# Altium PCB 数粒机接收板2通道.PcbDoc (part 1 of 2)
Units mm, origin at the board's own origin, x right, y up, seen from the top; angles counter-clockwise.
Board outline 152 x 52 mm, 2 copper layers (Top Layer, Bottom Layer); 73 components, 51 nets, 228 pads, 94 vias.
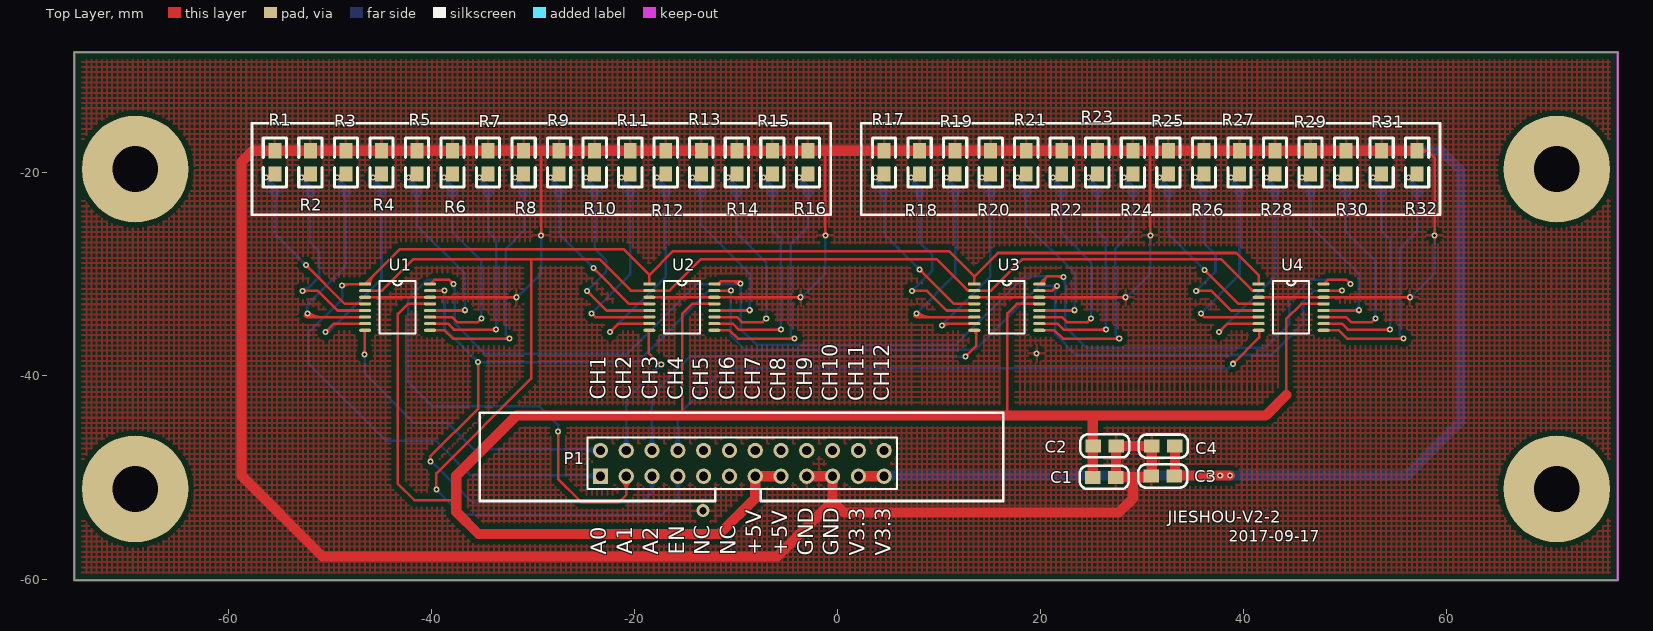
[diagram p0: Top Layer view]
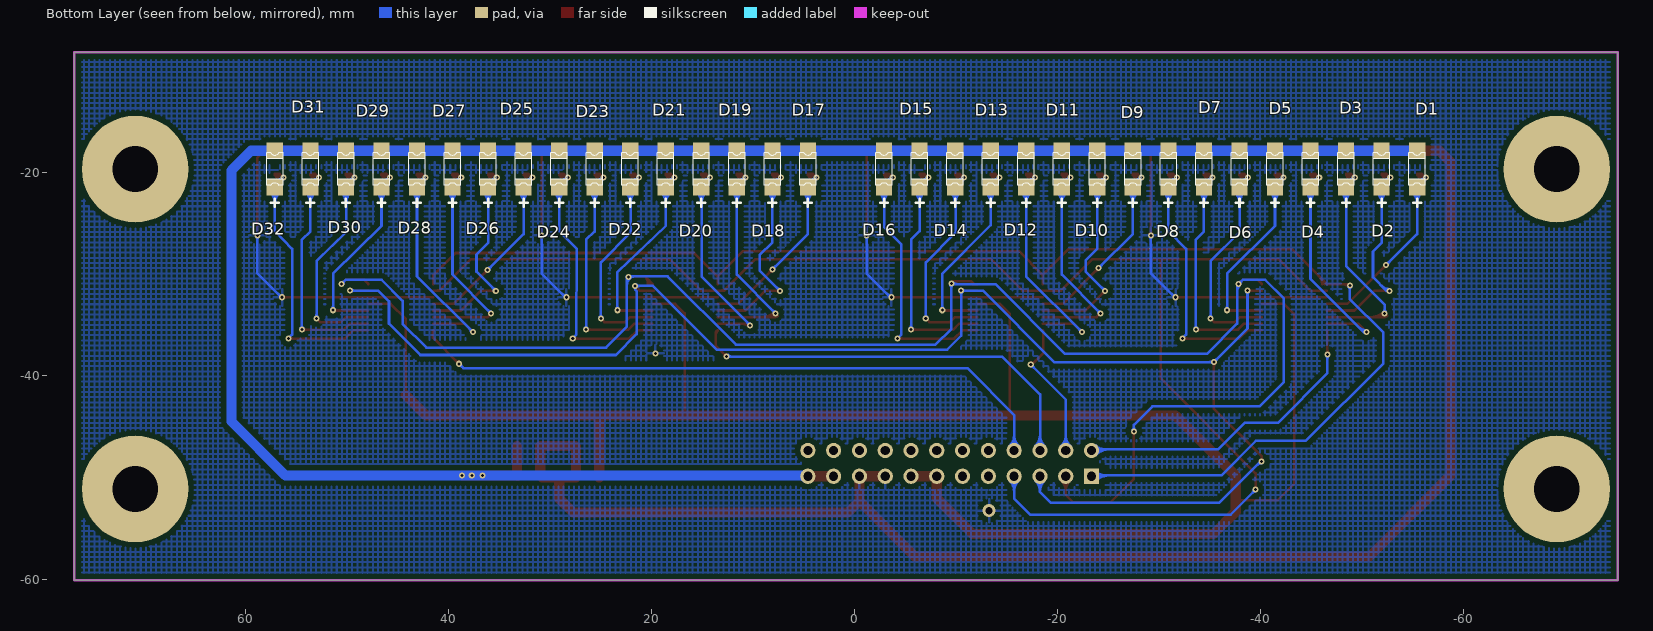
[diagram p1: Bottom Layer view, seen from below]

## Layer stack, top to bottom
Top Layer: signal copper 0.0356
Dielectric: dielectric 0.32, FR-4, Dk 4.8
Bottom Layer: signal copper 0.0356

## Board outline
-75.169,-60.122 76.831,-60.122 76.831,-8.122 -75.169,-8.122

## Design rules (kind name [scope] priority, off if disabled: settings)
Clearance Clearance_1 [InPolygon] p1: gap=0.508
Clearance [All] p2: gap=0.2
HoleSize [All] p1 off: absolutevalues=TRUE maxlimit=2.54 minlimit=0.025 maxpercent=80.000 minpercent=20.000
MinimumSolderMaskSliver [All] p1 off: minsoldermaskwidth=0.2
PolygonConnect [All] p1: connectstyle=Relief reliefconductorwidth=0.254 reliefentries=4 polygonreliefangle="90 Angle"
RoutingVias [All] p1: holewidth=0.254 width=0.6 viastyle="Through Hole" minholewidth=0.254 minwidth=0.6 maxholewidth=0.254 maxwidth=0.6
SilkToSilkClearance [All] p1: silktosilkclearance=-10
SilkscreenOverComponentPads [All] p1: minsilkscreentomaskgap=0
SolderMaskExpansion [All] p1: expansion=0.102
TestPointUsage [All] p1: valid=0 allowmultiple=FALSE
Testpoint [(IsPad And (OnTopLayer Or OnBottomLayer))] p1: side=3 testpointundercomponent=TRUE minsize=1.016 maxsize=2.54 preferedsize=1.524 minholesize=0 maxholesize=1.016 preferedholesize=0.813 testpointgrid=0.025 style=297 order=0-112345678
Width [All] p1: maxlimit=2 minlimit=0.2 preferedwidth=0.254
20 further rules are at their usual default settings.

## Components (designator, comment, footprint, x,y, rotation, side; value= is the part's Value field where it differs from the comment)
C1 "贴片电容 10uf" 0805c 27.412,-49.979 r180 top
C2 "贴片电容 0.1uf" 0805c 27.463,-46.88 r180 top
C3 "贴片电容 10uf" 0805c 30.892,-49.852 r0 top
C4 "贴片电容 0.1uf" 0805c 30.943,-46.905 r0 top
D1 "红外接收珠子" jieshou1206 -55.419,-21.422 r0 bottom
D2 "红外接收珠子" jieshou1206 -51.919,-21.422 r0 bottom
D3 "红外接收珠子" jieshou1206 -48.419,-21.422 r0 bottom
D4 "红外接收珠子" jieshou1206 -44.919,-21.422 r0 bottom
D5 "红外接收珠子" jieshou1206 -41.419,-21.422 r0 bottom
D6 "红外接收珠子" jieshou1206 -37.919,-21.422 r0 bottom
D7 "红外接收珠子" jieshou1206 -34.419,-21.422 r0 bottom
D8 "红外接收珠子" jieshou1206 -30.919,-21.422 r0 bottom
D9 "红外接收珠子" jieshou1206 -27.419,-21.422 r0 bottom
D10 "红外接收珠子" jieshou1206 -23.919,-21.422 r0 bottom
D11 "红外接收珠子" jieshou1206 -20.419,-21.422 r0 bottom
D12 "红外接收珠子" jieshou1206 -16.919,-21.422 r0 bottom
D13 "红外接收珠子" jieshou1206 -13.419,-21.422 r0 bottom
D14 "红外接收珠子" jieshou1206 -9.919,-21.422 r0 bottom
D15 "红外接收珠子" jieshou1206 -6.419,-21.422 r0 bottom
D16 "红外接收珠子" jieshou1206 -2.919,-21.422 r0 bottom
D17 "红外接收珠子" jieshou1206 4.581,-21.422 r0 bottom
D18 "红外接收珠子" jieshou1206 8.081,-21.422 r0 bottom
D19 "红外接收珠子" jieshou1206 11.581,-21.422 r0 bottom
D20 "红外接收珠子" jieshou1206 15.081,-21.422 r0 bottom
D21 "红外接收珠子" jieshou1206 18.581,-21.422 r0 bottom
D22 "红外接收珠子" jieshou1206 22.081,-21.422 r0 bottom
D23 "红外接收珠子" jieshou1206 25.581,-21.422 r0 bottom
D24 "红外接收珠子" jieshou1206 29.081,-21.422 r0 bottom
D25 "红外接收珠子" jieshou1206 32.581,-21.422 r0 bottom
D26 "红外接收珠子" jieshou1206 36.081,-21.422 r0 bottom
D27 "红外接收珠子" jieshou1206 39.581,-21.422 r0 bottom
D28 "红外接收珠子" jieshou1206 43.081,-21.422 r0 bottom
D29 "红外接收珠子" jieshou1206 46.581,-21.422 r0 bottom
D30 "红外接收珠子" jieshou1206 50.081,-21.422 r0 bottom
D31 "红外接收珠子" jieshou1206 53.581,-21.422 r0 bottom
D32 "红外接收珠子" jieshou1206 57.081,-21.422 r0 bottom
P1 "牛角插座" HDR2X12 -23.351,-49.87 r0 top
R1 "贴片电阻" 0805r -55.419,-17.822 r270 top
R2 "贴片电阻" 0805r -51.919,-17.822 r270 top
R3 "贴片电阻" 0805r -48.419,-17.822 r270 top
R4 "贴片电阻" 0805r -44.919,-17.822 r270 top
R5 "贴片电阻" 0805r -41.419,-17.822 r270 top
R6 "贴片电阻" 0805r -37.919,-17.822 r270 top
R7 "贴片电阻" 0805r -34.419,-17.822 r270 top
R8 "贴片电阻" 0805r -30.919,-17.822 r270 top
R9 "贴片电阻" 0805r -27.419,-17.822 r270 top
R10 "贴片电阻" 0805r -23.919,-17.822 r270 top
R11 "贴片电阻" 0805r -20.419,-17.822 r270 top
R12 "贴片电阻" 0805r -16.919,-17.822 r270 top
R13 "贴片电阻" 0805r -13.419,-17.822 r270 top
R14 "贴片电阻" 0805r -9.919,-17.822 r270 top
R15 "贴片电阻" 0805r -6.419,-17.822 r270 top
R16 "贴片电阻" 0805r -2.919,-17.822 r270 top
R17 "贴片电阻" 0805r 4.581,-17.822 r270 top
R18 "贴片电阻" 0805r 8.081,-17.822 r270 top
R19 "贴片电阻" 0805r 11.581,-17.822 r270 top
R20 "贴片电阻" 0805r 15.081,-17.822 r270 top
R21 "贴片电阻" 0805r 18.581,-17.822 r270 top
R22 "贴片电阻" 0805r 22.081,-17.822 r270 top
R23 "贴片电阻" 0805r 25.581,-17.822 r270 top
R24 "贴片电阻" 0805r 29.081,-17.822 r270 top
R25 "贴片电阻" 0805r 32.581,-17.822 r270 top
R26 "贴片电阻" 0805r 36.081,-17.822 r270 top
R27 "贴片电阻" 0805r 39.581,-17.822 r270 top
R28 "贴片电阻" 0805r 43.081,-17.822 r270 top
R29 "贴片电阻" 0805r 46.581,-17.822 r270 top
R30 "贴片电阻" 0805r 50.081,-17.822 r270 top
R31 "贴片电阻" 0805r 53.581,-17.822 r270 top
R32 "贴片电阻" 0805r 57.081,-17.822 r270 top
U1 "集成电路" TSSOP16 -46.532,-30.947 r0 top
U2 "集成电路" TSSOP16 -18.532,-30.947 r0 top
U3 "集成电路" TSSOP16 13.468,-30.947 r0 top
U4 "集成电路" TSSOP16 41.468,-30.947 r0 top

## Footprints (in the part's own frame and the unit in brackets; to place one, negate y for a bottom-side part, rotate by r counter-clockwise, add the part's x,y. Pads: shape width x height; smd on the part's side, far side on the other; paste and mask are expansions set on the pad)
0805c [mil]
  rect 60x50 smd: 1(0,0) 2(90,0)
  silkscreen extent -50,-45 140,45
0805r [mil]
  rect 60x50 smd: 1(0,0) 2(90,0)
  silkscreen extent -50,-45 140,45
HDR2X12 [mm] "Connector; Header; 12x2 P"
  rect 1.5x1.5 hole 0.9: 1(0,0)
  round 1.5 hole 0.9: 2(0,2.54) 3(2.54,0) 4(2.54,2.54) 5(5.08,0) 6(5.08,2.54) 7(7.62,0) 8(7.62,2.54) 9(10.16,0) 10(10.16,2.54) 11(12.7,0) 12(12.7,2.54) 13(15.24,0) 14(15.24,2.54) 15(17.78,0) 16(17.78,2.54) 17(20.32,0) 18(20.32,2.54) 19(22.86,0) 20(22.86,2.54) 21(25.4,0) 22(25.4,2.54) 23(27.94,0) 24(27.94,2.54)
  silkscreen extent -1.27,-1.27 29.21,3.81
jieshou1206 [mm]
  rect 1.6x1.6 smd: 1(0,0) 2(0,-3.6)
  silkscreen extent -0.8,-3.41 0.82,1.9
TSSOP16 [mm]
  rect 1.2x0.3 smd: 1(0,0)
  oval 1.2x0.3 smd: 2(0,-0.65) 3(0,-1.3) 4(0,-1.95) 5(0,-2.6) 6(0,-3.25) 7(0,-3.9) 8(0,-4.55) 9(6.4,-4.55) 10(6.4,-3.9) 11(6.4,-3.25) 12(6.4,-2.6) 13(6.4,-1.95) 14(6.4,-1.3) 15(6.4,-0.65) 16(6.4,0)
  silkscreen extent 1.43,-4.88 4.96,0.33

## Part data
C1 C2 C3 C4: library part Cap, "Ca"
D1 D2 D3 D4 D5 D6 D7 D8 D9 D10 D11 D12 D13 D14 D15 D16 D17 D18 D19 D20 D21 D22 D23 D24 D25 D26 D27 D28 D29 D30 D31 D32: library part LED0, "PD15-"
P1: library part "Header 12X2", "Header, 12-Pin, Dual row"
R1 R2 R3 R4 R5 R6 R7 R8 R9 R10 R11 R12 R13 R14 R15 R16 R17 R18 R19 R20 R21 R22 R23 R24 R25 R26 R27 R28 R29 R30 R31 R32: library part Res3
U1 U2 U3 U4: library part ADG708

## Free pads (board coordinates)
  round 10.5 hole 4.5 unplated: 1(-69.169,-19.622) 2(-69.169,-51.122) 3(70.831,-51.122) 4(70.831,-19.622)

## Via types
v1: diameter 0.6, hole 0.3, Top Layer to Bottom Layer, 93 vias
v2: diameter 1.27, hole 0.711, Top Layer to Bottom Layer, 1 vias

## Nets (pads, with @x,y where several pads share a name; then routed paths per layer and width w, separated by ;. In a path a pad name is that pad's centre, name@x,y a point inside that pad or via, vN(x,y) a via of type N, cw(c..) or ccw(c..) an arc to the next point about the centre after c; other vN are vias at no path point)
A0: P1.1 U1.1 U2.1 U3.1 U4.1 | length 147.5
  Top Layer w0.254: v1(-48.792,-31.084) -48.655,-30.947 U1.1@-46.532,-30.947 -43.088,-27.503 -21.063,-27.503 -18.532,-30.034 U2.1@-18.532,-30.947 ; v1@-48.67,-31.206 cw(c-48.044,-31.833) -48.044,-30.947 ; U1.1@-46.313,-30.947 cw(c-45.784,-30.947) -46.158,-30.573 ; U1.1@-46.059,-30.947 cw(c-44.917,-30.947) -45.724,-30.139 ; -18.532,-30.043 -16.195,-27.706 10.979,-27.706 13.468,-30.195 ; U3.1@13.468,-30.947 13.468,-30.195 ; U4.1@41.468,-30.947 41.468,-30.075 39.277,-27.884 15.779,-27.884 13.468,-30.195
  Bottom Layer w0.254: v1@-48.915,-31.206 cw(c-49.271,-31.563) -48.767,-31.563 ; v1(-48.792,-31.084) -48.767,-31.109 -48.767,-32.405 -52.083,-35.721 -52.083,-38.748 -44.434,-46.397 -39.524,-46.397 -36.127,-49.794 P1.1@-23.351,-49.794 ; -48.767,-31.44 cw(c-48.436,-31.44) v1@-48.67,-31.206 ; -25.039,-49.794 cw(c-25.039,-51.558) P1.1@-23.792,-50.31 ; -24.671,-49.794 ccw(c-24.671,-48.55) P1.1@-23.792,-49.429 ; -24.426,-49.794 cw(c-24.426,-50.945) P1.1@-23.612,-50.131
A1: P1.3 U1.16 U2.16 U3.16 U4.16 | length 185
  Top Layer w0.254: U1.16@-40.132,-30.947 -39.706,-30.521 -38.256,-30.521 v1(-37.82,-30.957) ; v1@-37.993,-30.957 ccw(c-38.41,-30.957) -38.115,-30.662 ccw(c-37.82,-30.366) v1@-37.82,-30.784 ; v1@-27.639,-45.573 cw(c-27.934,-45.868) -27.517,-45.868 cw(c-27.099,-45.868) v1@-27.394,-45.573 ; v1(-27.517,-45.45) -27.517,-50.124 -25.205,-52.435 -21.548,-52.435 -20.811,-51.699 P1.3@-20.811,-49.87 ; P1.3@-21.252,-50.31 cw(c-22.315,-51.374) -20.811,-51.374 cw(c-19.307,-51.374) P1.3@-20.371,-50.31 ; P1.3@-21.072,-50.131 cw(c-21.702,-50.761) -20.811,-50.761 cw(c-19.92,-50.761) P1.3@-20.55,-50.131 ; U2.16@-12.132,-30.947 -11.763,-30.947 -11.49,-30.674 -9.788,-30.674 -9.601,-30.86 v1@-9.601,-30.947 ; U2.16@-11.659,-30.947 cw(c-11.408,-30.947) -11.585,-30.769 ; -10.52,-30.674 cw(c-10.52,-31.885) v1@-9.663,-31.029 ; -9.906,-30.674 cw(c-9.906,-31.272) v1@-9.483,-30.849 ; U3.16@19.868,-30.947 20.624,-30.191 ; U3.16@20.088,-30.962 cw(c20.572,-30.929) 20.229,-30.586 ; U3.16@20.341,-30.945 cw(c21.312,-30.879) 20.624,-30.191 ; 21.697,-30.191 cw(c21.697,-30.782) v1@22.115,-30.364 ; v1(22.238,-30.242) 22.187,-30.191 20.624,-30.191 ; U4.16@47.868,-30.947 48.294,-30.521 50.1,-30.521 v1(50.536,-30.957) ; v1@50.363,-30.957 ccw(c49.945,-30.957) 50.241,-30.662 ccw(c50.536,-30.366) v1@50.536,-30.784
  Bottom Layer w0.254: v1@-37.993,-30.957 ccw(c-38.41,-30.957) -38.115,-30.662 ccw(c-37.82,-30.366) v1@-37.82,-30.784 ; v1@-37.942,-31.079 cw(c-38.544,-31.681) -37.693,-31.681 ; v1@-27.639,-45.328 ccw(c-27.934,-45.033) -27.517,-45.033 ccw(c-27.099,-45.033) v1@-27.394,-45.328 ; v1(-27.517,-45.45) -27.517,-44.826 -29.349,-42.994 -39.872,-42.994 -42.29,-40.576 -42.29,-37.332 -42.29,-32.354 -40.457,-30.521 -38.256,-30.521 -37.693,-31.084 -37.693,-34.843 -34.721,-37.815 -20.742,-37.815 -13.873,-30.947 -9.581,-30.947 v1(-9.54,-30.906) -9.54,-35.351 -7.973,-36.918 11.673,-36.918 18.4,-30.191 22.409,-30.191 22.409,-35.148 24.459,-37.198 42.161,-37.198 44.491,-34.869 44.491,-32.608 46.578,-30.521 50.1,-30.521 v1@50.526,-30.947 ; -10.056,-30.947 ccw(c-10.056,-30.391) v1@-9.663,-30.784 ; -9.86,-30.947 cw(c-9.86,-31.226) -9.663,-31.029 cw(c-9.958,-31.324) -9.54,-31.324 cw(c-9.123,-31.324) v1@-9.418,-31.029 ; 21.697,-30.191 cw(c21.697,-30.782) 22.115,-30.364 cw(c21.406,-31.073) 22.409,-31.073 ; v1@50.363,-30.957 ccw(c49.945,-30.957) 50.241,-30.662 ccw(c50.536,-30.366) v1@50.536,-30.784 ; v1@50.526,-30.957 v1@50.526,-30.947 ; v1(50.536,-30.957) v1@50.526,-30.947
A2: P1.5 U1.15 U2.15 U3.15 U4.15 | length 170.9
  Top Layer w0.254: v1@-40.217,-48.303 ccw(c-40.451,-48.069) -40.12,-48.069 ; U1.15@-40.132,-31.597 v1(-38.714,-31.597) ; -40.12,-47.946 ccw(c-39.616,-47.946) v1@-39.972,-48.303 ; v1(-40.095,-48.425) -40.12,-48.4 -40.12,-47.943 -35.407,-43.23 v1(-35.407,-38.628) ; v1@-38.836,-31.719 ccw(c-39.131,-32.014) -39.131,-31.597 ccw(c-39.131,-31.179) v1@-38.836,-31.474 ; v1@-35.529,-38.75 cw(c-35.824,-39.045) -35.407,-39.045 cw(c-34.989,-39.045) v1@-35.284,-38.75 ; U2.15@-12.132,-31.597 v1(-10.505,-31.597) ; v1@-10.628,-31.719 ccw(c-10.923,-32.014) -10.923,-31.597 ccw(c-10.923,-31.179) v1@-10.628,-31.474 ; U3.15@19.774,-31.613 21.12,-31.613 v1(21.603,-31.131) ; v1@21.43,-31.131 cw(c21.012,-31.131) 21.307,-31.426 cw(c21.603,-31.721) v1@21.603,-31.304 ; U4.15@47.868,-31.597 49.667,-31.597 v1(49.698,-31.567) ; 49.207,-31.597 ccw(c49.207,-31.076) v1@49.575,-31.444 ; 49.353,-31.597 cw(c49.353,-31.911) v1@49.575,-31.689
  Bottom Layer w0.254: v1@-40.095,-48.598 cw(c-40.095,-49.281) -39.612,-48.798 ; v1(-40.095,-48.425) -40.095,-48.361 -40.089,-48.355 -40.056,-48.355 -35.924,-52.486 -19.338,-52.486 -18.271,-51.419 P1.5@-18.271,-49.87 ; v1@-38.836,-31.719 cw(c-39.131,-32.014) -38.714,-32.014 cw(c-38.296,-32.014) v1@-38.591,-31.719 ; v1(-38.714,-31.597) -38.714,-35.321 v1(-35.407,-38.628) -19.675,-38.628 -12.644,-31.597 v1(-10.505,-31.597) -10.505,-36.037 -9.141,-37.401 13.577,-37.401 19.847,-31.131 v1(21.603,-31.131) 21.603,-31.484 21.444,-31.643 21.444,-35.885 23.494,-37.935 42.746,-37.935 45.837,-34.843 45.837,-32.659 46.899,-31.597 49.667,-31.597 v1(49.698,-31.567) ; v1@-35.58,-38.628 ccw(c-35.997,-38.628) -35.702,-38.332 ccw(c-35.407,-38.037) v1@-35.407,-38.455 ; v1@-35.284,-38.75 cw(c-34.989,-39.045) -34.989,-38.628 cw(c-34.989,-38.21) v1@-35.284,-38.505 ; P1.5@-18.712,-50.31 cw(c-19.775,-51.374) -18.271,-51.374 cw(c-16.767,-51.374) P1.5@-17.831,-50.31 ; P1.5@-18.532,-50.131 cw(c-19.162,-50.761) -18.271,-50.761 cw(c-17.38,-50.761) P1.5@-18.01,-50.131 ; v1@-10.628,-31.474 cw(c-10.923,-31.179) -10.923,-31.597 cw(c-10.923,-32.014) -10.628,-31.719 cw(c-10.923,-32.014) -10.505,-32.014 cw(c-10.088,-32.014) v1@-10.383,-31.719 ; v1@21.48,-31.253 ccw(c21.185,-31.548) 21.185,-31.131 ccw(c21.185,-30.713) v1@21.48,-31.008 ; 49.207,-31.597 ccw(c49.207,-31.076) v1@49.575,-31.444 ; 49.353,-31.597 cw(c49.353,-31.911) v1@49.575,-31.689
CH1: P1.2 U1.8 | length 35.5
  Top Layer w0.254: v1@-46.705,-37.743 ccw(c-47,-37.448) -46.583,-37.448 ccw(c-46.165,-37.448) v1@-46.46,-37.743 ; v1(-46.583,-37.866) -46.583,-35.548 U1.8@-46.532,-35.497 ; -46.583,-35.675 cw(c-46.354,-35.675) U1.8@-46.516,-35.513
  Bottom Layer w0.254: v1@-46.705,-37.988 cw(c-47,-38.283) -46.583,-38.283 cw(c-46.165,-38.283) v1@-46.46,-37.988 ; v1(-46.583,-37.866) -46.583,-39.727 -41.695,-44.615 -38.435,-44.615 -35.848,-47.203 P1.2@-23.351,-47.203 ; -25.162,-47.203 cw(c-25.162,-49.14) P1.2@-23.792,-47.77 ; P1.2@-23.792,-46.889 cw(c-24.549,-46.132) -24.549,-47.203 cw(c-24.549,-48.527) P1.2@-23.612,-47.591
CH1-1: D1.1 R1.2 U1.4 | length 29
  Top Layer w0.254: v1@-56.307,-20.518 cw(c-55.89,-20.936) R1.2@-55.561,-20.446 ; v1(-56.274,-20.435) -56.224,-20.435 -55.897,-20.108 R1.2@-55.419,-20.108 ; v1@-56.089,-20.3 cw(c-55.715,-20.674) R1.2@-55.419,-20.235 ; v1@-52.359,-29.247 cw(c-52.359,-29.665) -52.063,-29.37 cw(c-51.768,-29.074) v1@-52.186,-29.074 ; v1(-52.359,-29.074) -48.536,-32.897 U1.4@-46.532,-32.897
  Bottom Layer w0.254: v1@-56.274,-20.608 cw(c-56.274,-21.025) -55.979,-20.73 cw(c-55.684,-20.435) v1@-56.101,-20.435 ; v1(-56.274,-20.435) -55.419,-21.29 D1.1@-55.419,-21.422 -55.419,-26.014 v1(-52.359,-29.074) v1@-52.351,-29.066 ; D1.1@-56.076,-21.276 ccw(c-57.035,-21.063) -56.34,-20.369 ccw(c-55.422,-19.451) D1.1@-55.42,-20.749 ; D1.1@-56.013,-20.696 cw(c-56.499,-21.182) D1.1@-55.828,-21.331 ; D1.1@-55.895,-21.898 cw(c-57.044,-23.047) -55.419,-23.047 cw(c-53.795,-23.047) D1.1@-54.944,-21.898 ; D1.1@-55.716,-21.718 cw(c-56.431,-22.433) -55.419,-22.433 cw(c-54.408,-22.433) D1.1@-55.123,-21.718 ; v1@-52.532,-29.074 ccw(c-52.949,-29.074) -52.654,-28.779 ccw(c-52.359,-28.484) v1@-52.359,-28.901
CH1-2: D2.1 R2.2 U1.5 | length 31.5
  Top Layer w0.254: v1@-52.807,-20.518 cw(c-52.39,-20.936) R2.2@-52.061,-20.446 ; v1(-52.774,-20.435) -52.724,-20.435 -52.397,-20.108 R2.2@-51.919,-20.108 ; v1(-52.679,-31.617) -51.18,-31.617 -49.251,-33.547 U1.5@-46.532,-33.547 ; v1@-52.589,-20.3 cw(c-52.215,-20.674) R2.2@-51.919,-20.235 ; v1@-52.556,-31.74 cw(c-52.261,-32.035) -52.261,-31.617 cw(c-52.261,-31.2) v1@-52.556,-31.495
  Bottom Layer w0.254: v1@-52.774,-20.608 cw(c-52.774,-21.025) -52.479,-20.73 cw(c-52.184,-20.435) v1@-52.601,-20.435 ; v1(-52.774,-20.435) -51.919,-21.29 D2.1@-51.919,-21.422 -51.919,-26.898 -51.067,-27.75 -51.067,-30.264 -52.42,-31.617 v1(-52.679,-31.617) ; v1@-52.679,-31.698 ccw(c-52.679,-31.27) -52.376,-31.573 ; v1@-52.679,-31.444 ccw(c-52.679,-30.403) -51.942,-31.139 ; D2.1@-52.576,-21.276 ccw(c-53.534,-21.063) -52.84,-20.369 ccw(c-51.922,-19.451) D2.1@-51.92,-20.749 ; D2.1@-52.513,-20.696 cw(c-52.999,-21.182) D2.1@-52.328,-21.331 ; D2.1@-52.395,-21.898 cw(c-53.544,-23.047) -51.919,-23.047 cw(c-50.295,-23.047) D2.1@-51.444,-21.898 ; D2.1@-52.216,-21.718 cw(c-52.931,-22.433) -51.919,-22.433 cw(c-50.908,-22.433) D2.1@-51.623,-21.718
CH1-3: D3.1 R3.2 U1.6 | length 34.5
  Top Layer w0.254: -52.458,-34.064 ccw(c-52.138,-33.744) -52.138,-34.197 ; v1@-52.279,-33.884 ccw(c-51.525,-33.13) -51.525,-34.197 ; v1(-52.221,-33.827) -52.221,-34.056 -52.08,-34.197 U1.6@-46.532,-34.197 ; v1@-52.099,-33.705 ccw(c-50.911,-32.517) -50.911,-34.197 ; v1@-49.307,-20.518 cw(c-48.89,-20.936) R3.2@-48.561,-20.446 ; v1(-49.274,-20.435) -49.224,-20.435 -48.897,-20.108 R3.2@-48.419,-20.108 ; v1@-49.089,-20.3 cw(c-48.715,-20.674) R3.2@-48.419,-20.235
  Bottom Layer w0.254: v1@-52.344,-33.705 ccw(c-52.639,-33.41) -52.221,-33.41 ccw(c-51.804,-33.41) v1@-52.099,-33.705 ; v1(-52.221,-33.827) -52.221,-32.964 -48.419,-29.161 D3.1@-48.419,-21.422 -48.419,-21.29 v1(-49.274,-20.435) ; v1@-49.274,-20.608 cw(c-49.274,-21.025) -48.979,-20.73 cw(c-48.684,-20.435) v1@-49.101,-20.435 ; D3.1@-49.076,-21.276 ccw(c-50.034,-21.063) -49.34,-20.369 ccw(c-48.423,-19.451) D3.1@-48.42,-20.749 ; D3.1@-49.013,-20.696 cw(c-49.499,-21.182) D3.1@-48.828,-21.331 ; D3.1@-48.895,-21.898 cw(c-50.044,-23.047) -48.419,-23.047 cw(c-46.795,-23.047) D3.1@-47.944,-21.898 ; D3.1@-48.716,-21.718 cw(c-49.431,-22.433) -48.419,-22.433 cw(c-47.408,-22.433) D3.1@-48.123,-21.718
CH1-4: D4.1 R4.2 U1.7 | length 34.1
  Top Layer w0.254: v1(-50.418,-35.684) -49.581,-34.847 U1.7@-46.532,-34.847 ; v1@-50.418,-35.511 ccw(c-50.418,-35.093) -50.123,-35.388 ccw(c-49.827,-35.684) v1@-50.245,-35.684 ; v1@-45.807,-20.518 cw(c-45.39,-20.936) R4.2@-45.061,-20.446 ; v1(-45.774,-20.435) -45.724,-20.435 -45.397,-20.108 R4.2@-44.919,-20.108 ; v1@-45.589,-20.3 cw(c-45.215,-20.674) R4.2@-44.919,-20.235
  Bottom Layer w0.254: v1@-50.418,-35.765 ccw(c-50.418,-35.329) -50.11,-35.637 ; v1(-50.418,-35.684) -50.157,-35.684 -44.919,-30.446 D4.1@-44.919,-21.422 -44.919,-21.29 v1(-45.774,-20.435) ; v1@-50.418,-35.511 ccw(c-50.418,-34.462) -49.677,-35.203 ; v1@-45.774,-20.608 cw(c-45.774,-21.025) -45.479,-20.73 cw(c-45.184,-20.435) v1@-45.601,-20.435 ; D4.1@-45.576,-21.276 ccw(c-46.535,-21.063) -45.84,-20.369 ccw(c-44.922,-19.451) D4.1@-44.92,-20.749 ; D4.1@-45.513,-20.696 cw(c-45.999,-21.182) D4.1@-45.328,-21.331 ; D4.1@-45.395,-21.898 cw(c-46.544,-23.047) -44.919,-23.047 ; D4.1@-45.216,-21.718 cw(c-45.931,-22.433) -44.919,-22.433 cw(c-43.908,-22.433) D4.1@-44.623,-21.718 ; -44.919,-23.047 cw(c-43.295,-23.047) D4.1@-44.444,-21.898
CH1-5: D5.1 R5.2 U1.12 | length 30.2
  Top Layer w0.254: v1@-42.307,-20.518 cw(c-41.89,-20.936) R5.2@-41.561,-20.446 ; v1(-42.274,-20.435) -42.224,-20.435 -41.897,-20.108 R5.2@-41.419,-20.108 ; v1@-42.089,-20.3 cw(c-41.715,-20.674) R5.2@-41.419,-20.235 ; U1.12@-40.132,-33.547 -36.726,-33.547 v1(-36.702,-33.522) ; -37.179,-33.547 ccw(c-37.179,-33.046) v1@-36.824,-33.4 ; -37.061,-33.547 cw(c-37.061,-33.881) v1@-36.824,-33.645
  Bottom Layer w0.254: v1@-42.274,-20.608 cw(c-42.274,-21.025) -41.979,-20.73 cw(c-41.684,-20.435) v1@-42.101,-20.435 ; v1(-42.274,-20.435) -41.419,-21.29 D5.1@-41.419,-21.422 -41.419,-25.206 -36.702,-29.923 v1(-36.702,-33.522) ; D5.1@-42.076,-21.276 ccw(c-43.034,-21.063) -42.34,-20.369 ccw(c-41.422,-19.451) D5.1@-41.42,-20.749 ; D5.1@-42.013,-20.696 cw(c-42.499,-21.182) D5.1@-41.828,-21.331 ; D5.1@-41.895,-21.898 cw(c-43.044,-23.047) -41.419,-23.047 cw(c-39.795,-23.047) D5.1@-40.944,-21.898 ; D5.1@-41.716,-21.718 cw(c-42.431,-22.433) -41.419,-22.433 cw(c-40.408,-22.433) D5.1@-41.123,-21.718 ; v1@-36.824,-33.4 ccw(c-37.12,-33.105) -36.702,-33.105 ccw(c-36.284,-33.105) v1@-36.58,-33.4
CH1-6: D6.1 R6.2 U1.11 | length 31.5
  Top Layer w0.254: U1.11@-40.132,-34.197 -37.958,-34.197 -37.464,-34.691 -35.432,-34.691 v1(-35.076,-34.335) ; v1@-38.807,-20.518 cw(c-38.39,-20.936) R6.2@-38.061,-20.446 ; v1(-38.774,-20.435) -38.724,-20.435 -38.397,-20.108 R6.2@-37.919,-20.108 ; v1@-38.589,-20.3 cw(c-38.215,-20.674) R6.2@-37.919,-20.235
  Bottom Layer w0.254: v1@-38.774,-20.608 cw(c-38.774,-21.025) -38.479,-20.73 cw(c-38.184,-20.435) v1@-38.601,-20.435 ; v1(-38.774,-20.435) -37.919,-21.29 D6.1@-37.919,-21.422 ; D6.1@-38.576,-21.276 ccw(c-39.534,-21.063) -38.84,-20.369 ccw(c-37.922,-19.451) D6.1@-37.92,-20.749 ; D6.1@-38.513,-20.696 cw(c-38.999,-21.182) D6.1@-38.328,-21.331 ; D6.1@-38.395,-21.898 cw(c-39.444,-22.946) -37.961,-22.946 ; D6.1@-38.216,-21.718 cw(c-38.831,-22.333) -37.961,-22.333 ; -37.961,-23.147 cw(c-36.194,-23.147) D6.1@-37.444,-21.898 ; -37.961,-22.534 cw(c-36.807,-22.534) D6.1@-37.623,-21.718 ; D6.1@-37.961,-21.422 -37.961,-25.794 -35.076,-28.678 v1(-35.076,-34.335) ; v1@-35.199,-34.213 ccw(c-35.494,-33.918) -35.076,-33.918 ccw(c-34.659,-33.918) v1@-34.954,-34.213
CH1-7: D7.1 R7.2 U1.10 | length 33.8
  Top Layer w0.254: U1.10@-40.132,-34.847 -38.375,-34.847 -37.794,-35.427 v1(-33.629,-35.427) ; v1@-35.307,-20.518 cw(c-34.89,-20.936) R7.2@-34.561,-20.446 ; v1(-35.274,-20.435) -35.224,-20.435 -34.897,-20.108 R7.2@-34.419,-20.108 ; v1@-35.089,-20.3 cw(c-34.715,-20.674) R7.2@-34.419,-20.235 ; v1@-33.751,-35.55 ccw(c-34.046,-35.845) -34.046,-35.427 ccw(c-34.046,-35.01) v1@-33.751,-35.305
  Bottom Layer w0.254: v1@-35.274,-20.608 cw(c-35.274,-21.025) -34.979,-20.73 cw(c-34.684,-20.435) v1@-35.101,-20.435 ; v1(-35.274,-20.435) -34.419,-21.29 D7.1@-34.419,-21.422 -34.419,-25.78 -33.629,-26.57 v1(-33.629,-35.427) ; D7.1@-35.076,-21.276 ccw(c-36.034,-21.063) -35.34,-20.369 ccw(c-34.422,-19.451) D7.1@-34.42,-20.749 ; D7.1@-35.013,-20.696 cw(c-35.499,-21.182) D7.1@-34.828,-21.331 ; D7.1@-34.895,-21.898 cw(c-36.044,-23.047) -34.419,-23.047 ; D7.1@-34.716,-21.718 cw(c-35.431,-22.433) -34.419,-22.433 cw(c-33.408,-22.433) D7.1@-34.123,-21.718 ; -34.419,-23.047 cw(c-32.795,-23.047) D7.1@-33.944,-21.898 ; v1@-33.751,-35.305 ccw(c-34.046,-35.01) -33.629,-35.01 ccw(c-33.211,-35.01) v1@-33.506,-35.305
CH1-8: D8.1 R8.2 U1.9 | length 35.9
  Top Layer w0.254: U1.9@-40.132,-35.497 -38.69,-35.497 -37.87,-36.316 -32.333,-36.316 v1(-32.308,-36.291) ; -32.787,-36.316 ccw(c-32.787,-35.812) v1@-32.43,-36.169 ; -32.664,-36.316 cw(c-32.664,-36.647) v1@-32.43,-36.413 ; v1@-31.807,-20.518 cw(c-31.39,-20.936) R8.2@-31.061,-20.446 ; v1(-31.774,-20.435) -31.724,-20.435 -31.397,-20.108 R8.2@-30.919,-20.108 ; v1@-31.589,-20.3 cw(c-31.215,-20.674) R8.2@-30.919,-20.235
  Bottom Layer w0.254: v1(-32.308,-36.291) -32.663,-35.935 -32.663,-27.482 -30.919,-25.737 D8.1@-30.919,-21.422 -30.919,-21.29 v1(-31.774,-20.435) ; v1@-31.774,-20.608 cw(c-31.774,-21.025) -31.479,-20.73 cw(c-31.184,-20.435) v1@-31.601,-20.435 ; D8.1@-31.576,-21.276 ccw(c-32.534,-21.063) -31.84,-20.369 ccw(c-30.923,-19.451) D8.1@-30.92,-20.749 ; D8.1@-31.513,-20.696 cw(c-31.999,-21.182) D8.1@-31.328,-21.331 ; D8.1@-31.395,-21.898 cw(c-32.544,-23.047) -30.919,-23.047 cw(c-29.295,-23.047) D8.1@-30.444,-21.898 ; D8.1@-31.216,-21.718 cw(c-31.931,-22.433) -30.919,-22.433 cw(c-29.908,-22.433) D8.1@-30.623,-21.718
CH2: P1.4 U2.8 | length 19
  Top Layer w0.254: -18.583,-35.675 cw(c-18.354,-35.675) U2.8@-18.516,-35.513 ; U2.8@-18.532,-35.497 -18.583,-35.548 -18.583,-37.764 -17.465,-38.882 v1(-17.363,-38.882) ; -17.832,-38.515 ccw(c-17.363,-38.046) v1@-17.363,-38.709
  Bottom Layer w0.254: P1.4@-21.252,-46.889 ccw(c-22.315,-45.826) -20.811,-45.826 ccw(c-19.307,-45.826) P1.4@-20.371,-46.889 ; P1.4@-21.072,-47.069 ccw(c-21.702,-46.439) -20.811,-46.439 ccw(c-19.92,-46.439) P1.4@-20.55,-47.069 ; P1.4@-20.811,-47.33 -20.811,-42.329 v1(-17.363,-38.882) -17.389,-38.907 v1@-17.389,-38.933 ; v1@-17.536,-38.882 cw(c-17.954,-38.882) -17.659,-39.177 cw(c-17.363,-39.472) v1@-17.363,-39.055
CH2-1: D9.1 R9.2 U2.4 | length 29
  Top Layer w0.254: v1@-28.307,-20.518 cw(c-27.89,-20.936) R9.2@-27.561,-20.446 ; v1(-28.274,-20.435) -28.224,-20.435 -27.897,-20.108 R9.2@-27.419,-20.108 ; v1@-28.089,-20.3 cw(c-27.715,-20.674) R9.2@-27.419,-20.235 ; v1@-24.051,-29.555 cw(c-24.051,-29.973) -23.755,-29.678 cw(c-23.46,-29.382) v1@-23.878,-29.382 ; v1(-24.051,-29.382) -20.536,-32.897 U2.4@-18.532,-32.897
  Bottom Layer w0.254: v1@-28.274,-20.608 cw(c-28.274,-21.025) -27.979,-20.73 cw(c-27.684,-20.435) v1@-28.101,-20.435 ; v1(-28.274,-20.435) -27.419,-21.29 D9.1@-27.419,-21.422 -27.419,-26.014 v1(-24.051,-29.382) ; D9.1@-28.076,-21.276 ccw(c-29.034,-21.063) -28.34,-20.369 ccw(c-27.422,-19.451) D9.1@-27.42,-20.749 ; D9.1@-28.013,-20.696 cw(c-28.499,-21.182) D9.1@-27.828,-21.331 ; D9.1@-27.895,-21.898 cw(c-29.044,-23.047) -27.419,-23.047 cw(c-25.795,-23.047) D9.1@-26.943,-21.898 ; D9.1@-27.716,-21.718 cw(c-28.431,-22.433) -27.419,-22.433 cw(c-26.408,-22.433) D9.1@-27.123,-21.718 ; v1@-24.224,-29.382 ccw(c-24.641,-29.382) -24.346,-29.087 ccw(c-24.051,-28.792) v1@-24.051,-29.209
CH2-2: D10.1 R10.2 U2.5 | length 31.1
  Top Layer w0.254: v1@-24.807,-20.518 cw(c-24.39,-20.936) R10.2@-24.061,-20.446 ; v1(-24.774,-20.435) -24.724,-20.435 -24.397,-20.108 R10.2@-23.919,-20.108 ; v1@-24.679,-31.79 cw(c-24.679,-32.208) -24.383,-31.913 cw(c-24.088,-31.617) v1@-24.506,-31.617 ; v1(-24.679,-31.617) -22.749,-33.547 U2.5@-18.532,-33.547 ; v1@-24.589,-20.3 cw(c-24.215,-20.674) R10.2@-23.919,-20.235
  Bottom Layer w0.254: v1@-24.774,-20.608 cw(c-24.774,-21.025) -24.479,-20.73 cw(c-24.184,-20.435) v1@-24.601,-20.435 ; v1(-24.774,-20.435) -23.919,-21.29 D10.1@-23.919,-21.422 -23.919,-27.466 -22.797,-28.588 -22.797,-29.736 v1(-24.679,-31.617) ; v1@-24.679,-31.444 ccw(c-24.679,-31.027) -24.383,-31.322 ccw(c-24.088,-31.617) v1@-24.506,-31.617 ; D10.1@-24.576,-21.276 ccw(c-25.534,-21.063) -24.84,-20.369 ccw(c-23.922,-19.451) D10.1@-23.92,-20.749 ; D10.1@-24.513,-20.696 cw(c-24.999,-21.182) D10.1@-24.328,-21.331 ; D10.1@-24.395,-21.898 cw(c-25.544,-23.047) -23.919,-23.047 cw(c-22.295,-23.047) D10.1@-23.444,-21.898 ; D10.1@-24.216,-21.718 cw(c-24.931,-22.433) -23.919,-22.433 cw(c-22.908,-22.433) D10.1@-23.623,-21.718
CH2-3: D11.1 R11.2 U2.6 | length 31.8
  Top Layer w0.254: v1(-24.221,-33.827) -23.852,-34.197 U2.6@-18.532,-34.197 ; v1@-21.307,-20.518 cw(c-20.89,-20.936) R11.2@-20.561,-20.446 ; v1(-21.274,-20.435) -21.224,-20.435 -20.897,-20.108 R11.2@-20.419,-20.108 ; v1@-21.089,-20.3 cw(c-20.715,-20.674) R11.2@-20.419,-20.235
  Bottom Layer w0.254: v1(-24.221,-33.827) -20.419,-30.025 D11.1@-20.419,-21.422 -20.419,-21.29 v1(-21.274,-20.435) ; v1@-24.221,-33.654 ccw(c-24.221,-33.237) -23.926,-33.532 ccw(c-23.631,-33.827) v1@-24.048,-33.827 ; v1@-21.274,-20.608 cw(c-21.274,-21.025) -20.979,-20.73 cw(c-20.684,-20.435) v1@-21.101,-20.435 ; D11.1@-21.076,-21.276 ccw(c-22.035,-21.063) -21.34,-20.369 ccw(c-20.422,-19.451) D11.1@-20.42,-20.749 ; D11.1@-21.013,-20.696 cw(c-21.499,-21.182) D11.1@-20.828,-21.331 ; D11.1@-20.895,-21.898 cw(c-22.044,-23.047) -20.419,-23.047 cw(c-18.795,-23.047) D11.1@-19.943,-21.898 ; D11.1@-20.716,-21.718 cw(c-21.431,-22.433) -20.419,-22.433 cw(c-19.408,-22.433) D11.1@-20.123,-21.718
CH2-4: D12.1 R12.2 U2.7 | length 33.5
  Top Layer w0.254: v1(-22.418,-35.684) -21.581,-34.847 U2.7@-18.532,-34.847 ; v1@-22.418,-35.511 ccw(c-22.418,-35.093) -22.123,-35.388 ccw(c-21.827,-35.684) v1@-22.245,-35.684 ; v1@-17.807,-20.518 cw(c-17.39,-20.936) R12.2@-17.061,-20.446 ; v1(-17.774,-20.435) -17.724,-20.435 -17.397,-20.108 R12.2@-16.919,-20.108 ; v1@-17.589,-20.3 cw(c-17.215,-20.674) R12.2@-16.919,-20.235
  Bottom Layer w0.254: v1(-22.418,-35.684) -16.919,-30.191 D12.1@-16.919,-21.422 -16.919,-21.29 v1(-17.774,-20.435) ; v1@-22.418,-35.511 ccw(c-22.418,-35.093) -22.123,-35.388 ccw(c-21.827,-35.684) v1@-22.245,-35.684 ; v1@-17.774,-20.608 cw(c-17.774,-21.025) -17.479,-20.73 cw(c-17.184,-20.435) v1@-17.601,-20.435 ; D12.1@-17.576,-21.276 ccw(c-18.534,-21.063) -17.84,-20.369 ccw(c-16.922,-19.451) D12.1@-16.92,-20.749 ; D12.1@-17.513,-20.696 cw(c-17.999,-21.182) D12.1@-17.328,-21.331 ; D12.1@-17.395,-21.898 cw(c-18.544,-23.047) -16.919,-23.047 ; D12.1@-17.216,-21.718 cw(c-17.931,-22.433) -16.919,-22.433 cw(c-15.908,-22.433) D12.1@-16.623,-21.718 ; -16.919,-23.047 cw(c-15.295,-23.047) D12.1@-16.443,-21.898
CH2-5: D13.1 R13.2 U2.12 | length 30.2
  Top Layer w0.254: v1@-14.307,-20.518 cw(c-13.89,-20.936) R13.2@-13.561,-20.446 ; v1(-14.274,-20.435) -14.224,-20.435 -13.897,-20.108 R13.2@-13.419,-20.108 ; v1@-14.089,-20.3 cw(c-13.715,-20.674) R13.2@-13.419,-20.235 ; U2.12@-12.081,-33.547 -8.676,-33.547 v1(-8.651,-33.522) ; -9.128,-33.547 ccw(c-9.128,-33.046) v1@-8.774,-33.4 ; -9.01,-33.547 cw(c-9.01,-33.881) v1@-8.774,-33.645
  Bottom Layer w0.254: v1@-14.274,-20.608 cw(c-14.274,-21.025) -13.979,-20.73 cw(c-13.684,-20.435) v1@-14.101,-20.435 ; v1(-14.274,-20.435) -13.419,-21.29 D13.1@-13.419,-21.422 -13.419,-25.155 -8.651,-29.923 v1(-8.651,-33.522) ; D13.1@-14.076,-21.276 ccw(c-15.034,-21.063) -14.34,-20.369 ccw(c-13.422,-19.451) D13.1@-13.42,-20.749 ; D13.1@-14.013,-20.696 cw(c-14.499,-21.182) D13.1@-13.828,-21.331 ; D13.1@-13.895,-21.898 cw(c-15.044,-23.047) -13.419,-23.047 cw(c-11.795,-23.047) D13.1@-12.944,-21.898 ; D13.1@-13.716,-21.718 cw(c-14.431,-22.433) -13.419,-22.433 cw(c-12.408,-22.433) D13.1@-13.123,-21.718 ; v1@-8.774,-33.4 ccw(c-9.069,-33.105) -8.651,-33.105 ccw(c-8.234,-33.105) v1@-8.529,-33.4
CH2-6: D14.1 R14.2 U2.11 | length 31.6
  Top Layer w0.254: U2.11@-12.081,-34.197 -9.907,-34.197 -9.413,-34.691 -7.381,-34.691 v1(-7.026,-34.335) ; v1@-10.807,-20.518 cw(c-10.39,-20.936) R14.2@-10.061,-20.446 ; v1(-10.774,-20.435) -10.724,-20.435 -10.397,-20.108 R14.2@-9.919,-20.108 ; v1@-10.589,-20.3 cw(c-10.215,-20.674) R14.2@-9.919,-20.235
  Bottom Layer w0.254: v1@-10.774,-20.608 cw(c-10.774,-21.025) -10.479,-20.73 cw(c-10.184,-20.435) v1@-10.601,-20.435 ; v1(-10.774,-20.435) -9.919,-21.29 D14.1@-9.919,-21.422 ; D14.1@-10.576,-21.276 ccw(c-11.534,-21.063) -10.84,-20.369 ccw(c-9.922,-19.451) D14.1@-9.92,-20.749 ; D14.1@-10.513,-20.696 cw(c-10.999,-21.182) D14.1@-10.328,-21.331 ; D14.1@-10.395,-21.898 cw(c-11.444,-22.946) -9.961,-22.946 ; D14.1@-10.216,-21.718 cw(c-10.831,-22.333) -9.961,-22.333 ; -9.961,-23.147 cw(c-8.194,-23.147) D14.1@-9.443,-21.898 ; -9.961,-22.534 cw(c-8.807,-22.534) D14.1@-9.623,-21.718 ; D14.1@-9.961,-21.422 -9.961,-25.886 -7.026,-28.822 v1(-7.026,-34.335) ; v1@-7.148,-34.213 ccw(c-7.443,-33.918) -7.026,-33.918 ccw(c-6.608,-33.918) v1@-6.903,-34.213
CH2-7: D15.1 R15.2 U2.10 | length 33.8
  Top Layer w0.254: U2.10@-12.081,-34.847 -10.324,-34.847 -9.743,-35.427 v1(-5.578,-35.427) ; v1@-7.307,-20.518 cw(c-6.89,-20.936) R15.2@-6.561,-20.446 ; v1(-7.274,-20.435) -7.224,-20.435 -6.897,-20.108 R15.2@-6.419,-20.108 ; v1@-7.089,-20.3 cw(c-6.715,-20.674) R15.2@-6.419,-20.235 ; v1@-5.7,-35.55 ccw(c-5.996,-35.845) -5.996,-35.427 ccw(c-5.996,-35.01) v1@-5.7,-35.305
  Bottom Layer w0.254: v1@-7.274,-20.608 cw(c-7.274,-21.025) -6.979,-20.73 cw(c-6.684,-20.435) v1@-7.101,-20.435 ; v1(-7.274,-20.435) -6.419,-21.29 D15.1@-6.419,-21.422 -6.419,-25.729 -5.578,-26.57 v1(-5.578,-35.427) ; D15.1@-7.076,-21.276 ccw(c-8.034,-21.063) -7.34,-20.369 ccw(c-6.422,-19.451) D15.1@-6.42,-20.749 ; D15.1@-7.013,-20.696 cw(c-7.499,-21.182) D15.1@-6.828,-21.331 ; D15.1@-6.895,-21.898 cw(c-8.044,-23.047) -6.419,-23.047 ; D15.1@-6.716,-21.718 cw(c-7.431,-22.433) -6.419,-22.433 cw(c-5.408,-22.433) D15.1@-6.123,-21.718 ; -6.419,-23.047 cw(c-4.795,-23.047) D15.1@-5.944,-21.898 ; v1@-5.7,-35.305 ccw(c-5.996,-35.01) -5.578,-35.01 ccw(c-5.16,-35.01) v1@-5.456,-35.305
CH2-8: D16.1 R16.2 U2.9 | length 35.9
  Top Layer w0.254: U2.9@-12.081,-35.497 -10.639,-35.497 -9.82,-36.316 -4.282,-36.316 v1(-4.257,-36.291) ; -4.736,-36.316 ccw(c-4.736,-35.812) v1@-4.379,-36.169 ; -4.613,-36.316 cw(c-4.613,-36.647) v1@-4.379,-36.413 ; v1@-3.807,-20.518 cw(c-3.39,-20.936) R16.2@-3.061,-20.446 ; v1(-3.774,-20.435) -3.724,-20.435 -3.397,-20.108 R16.2@-2.919,-20.108 ; v1@-3.589,-20.3 cw(c-3.215,-20.674) R16.2@-2.919,-20.235
  Bottom Layer w0.254: v1(-4.257,-36.291) -4.613,-35.935 -4.613,-27.027 -2.919,-25.334 D16.1@-2.919,-21.422 -2.919,-21.29 v1(-3.774,-20.435) ; v1@-3.774,-20.608 cw(c-3.774,-21.025) -3.479,-20.73 cw(c-3.184,-20.435) v1@-3.601,-20.435 ; D16.1@-3.576,-21.276 ccw(c-4.535,-21.063) -3.84,-20.369 ccw(c-2.922,-19.451) D16.1@-2.92,-20.749 ; D16.1@-3.513,-20.696 cw(c-3.999,-21.182) D16.1@-3.328,-21.331 ; D16.1@-3.395,-21.898 cw(c-4.544,-23.047) -2.919,-23.047 cw(c-1.295,-23.047) D16.1@-2.443,-21.898 ; D16.1@-3.216,-21.718 cw(c-3.931,-22.433) -2.919,-22.433 cw(c-1.908,-22.433) D16.1@-2.623,-21.718
CH3: P1.6 U3.8 | length 47.2
  Top Layer w0.254: v1(12.607,-38.07) 13.646,-37.031 13.646,-35.675 U3.8@13.468,-35.497 ; v1@12.607,-37.897 ccw(c12.607,-37.479) 12.903,-37.775 ccw(c13.198,-38.07) v1@12.78,-38.07 ; U3.8@13.452,-35.513 cw(c12.983,-35.982) 13.646,-35.982 ; U3.8@13.463,-35.519 cw(c13.411,-35.748) 13.646,-35.748
  Bottom Layer w0.254: P1.6@-18.712,-46.889 ccw(c-19.748,-45.853) -18.282,-45.853 ; P1.6@-18.532,-47.069 ccw(c-19.135,-46.466) -18.282,-46.466 ; P1.6@-18.282,-47.33 -18.282,-41.825 -14.541,-38.084 v1@12.607,-38.084 ; -18.282,-46.412 ccw(c-17.353,-46.412) P1.6@-18.01,-47.069 ; -18.282,-45.799 ccw(c-16.74,-45.799) P1.6@-17.831,-46.889 ; 12.155,-38.084 ccw(c12.155,-37.618) v1@12.485,-37.948 ; 12.224,-38.084 cw(c12.224,-38.453) v1@12.485,-38.192 ; v1@12.447,-37.909 v1(12.607,-38.07)